# Altium PCB PCB1.PcbDoc
Units mm, origin at the board's own origin, x right, y up, seen from the top; angles counter-clockwise.
Board outline 60 x 60 mm, 2 copper layers (Top Layer, Bottom Layer); 13 components, 9 nets, 38 pads, 9 vias.
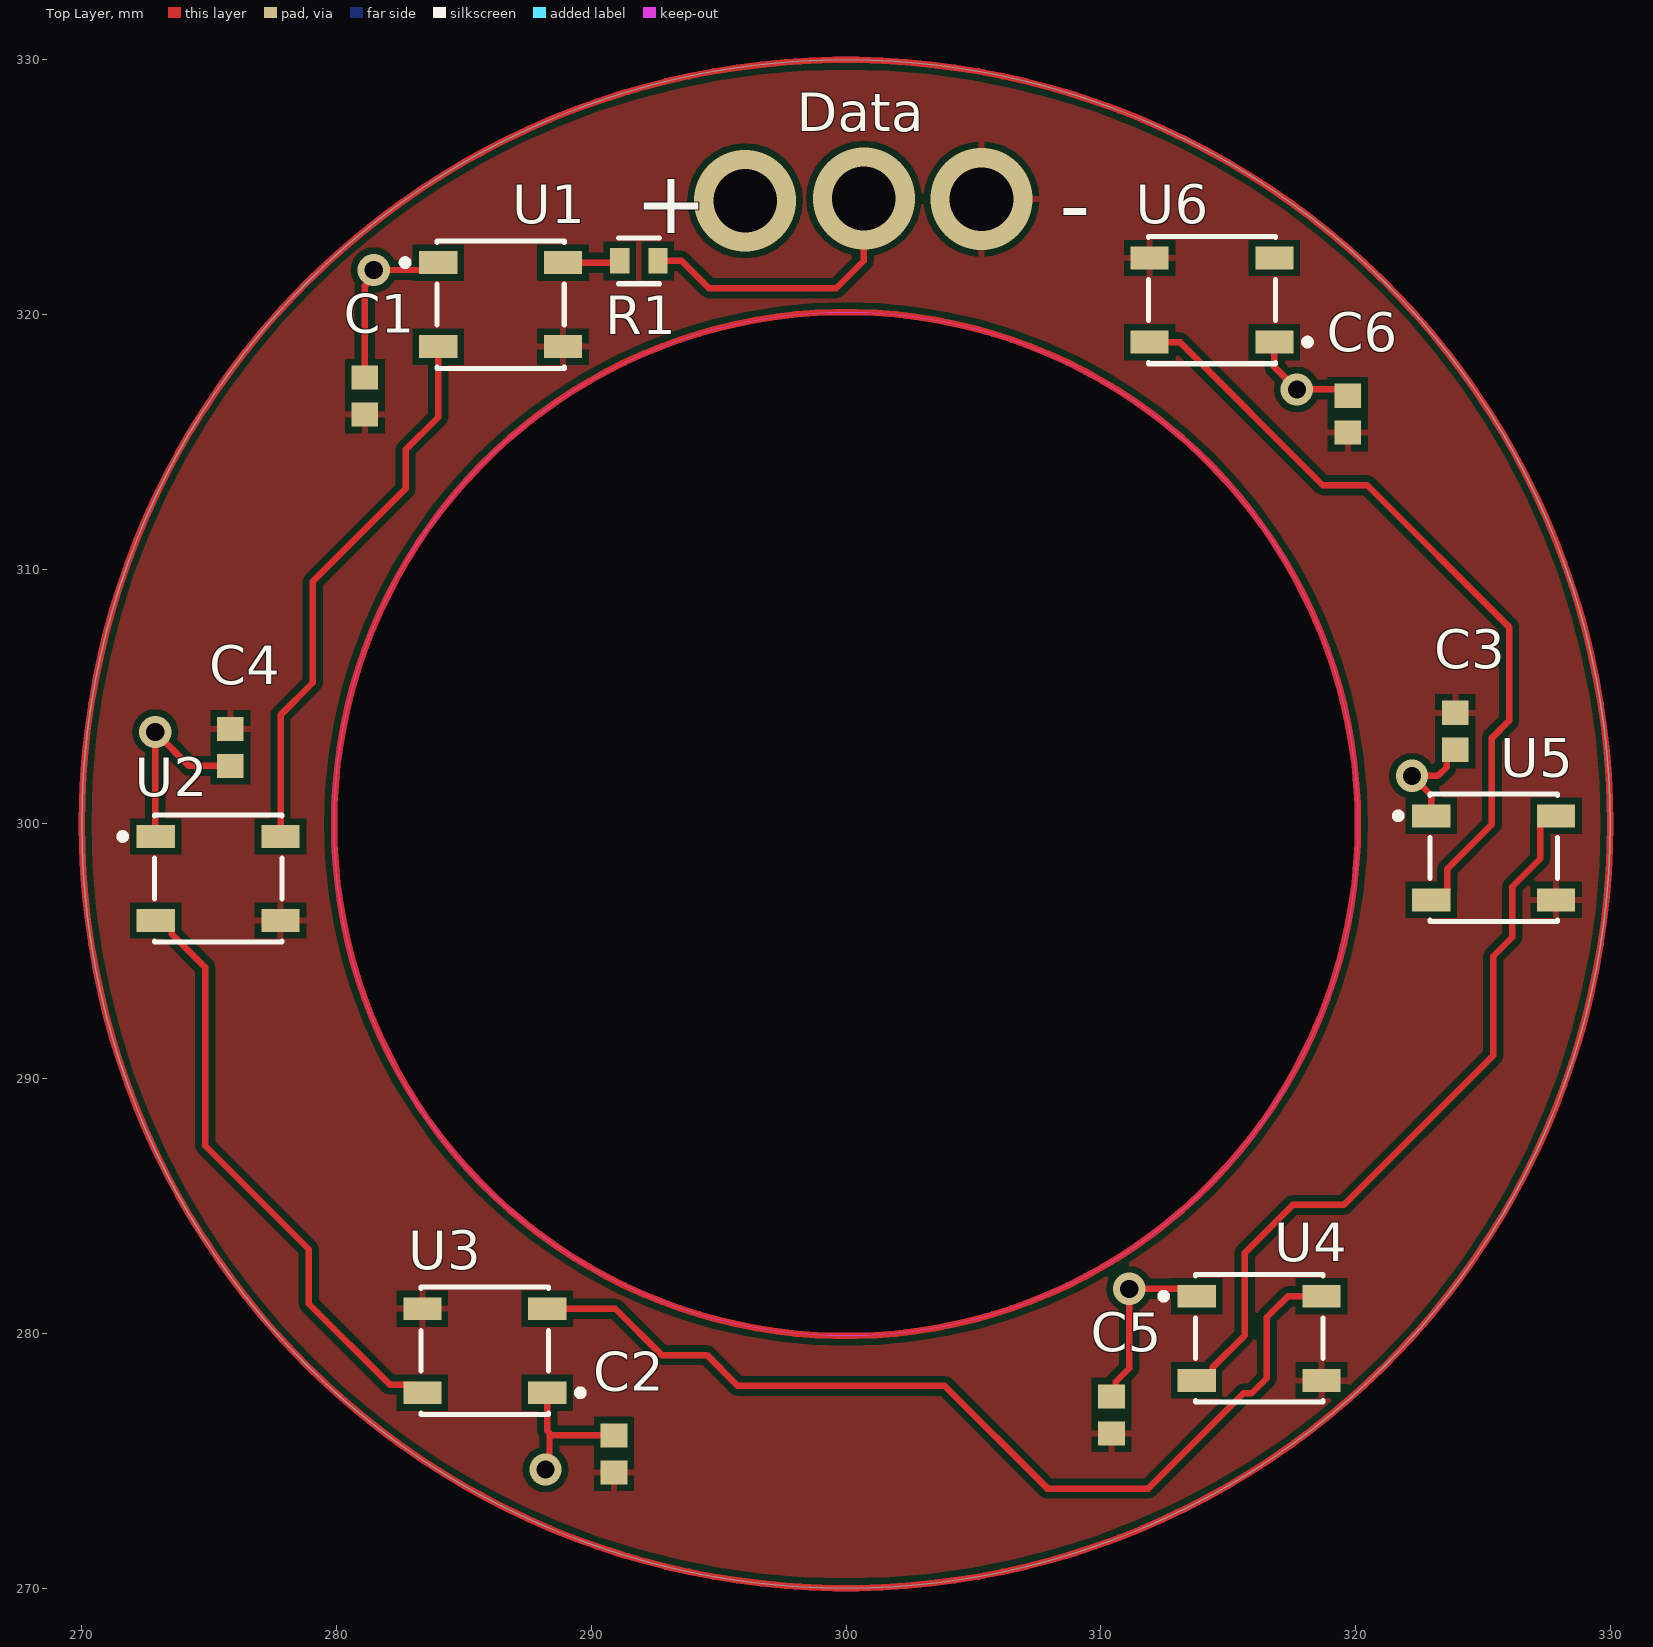
[diagram p0: Top Layer view]
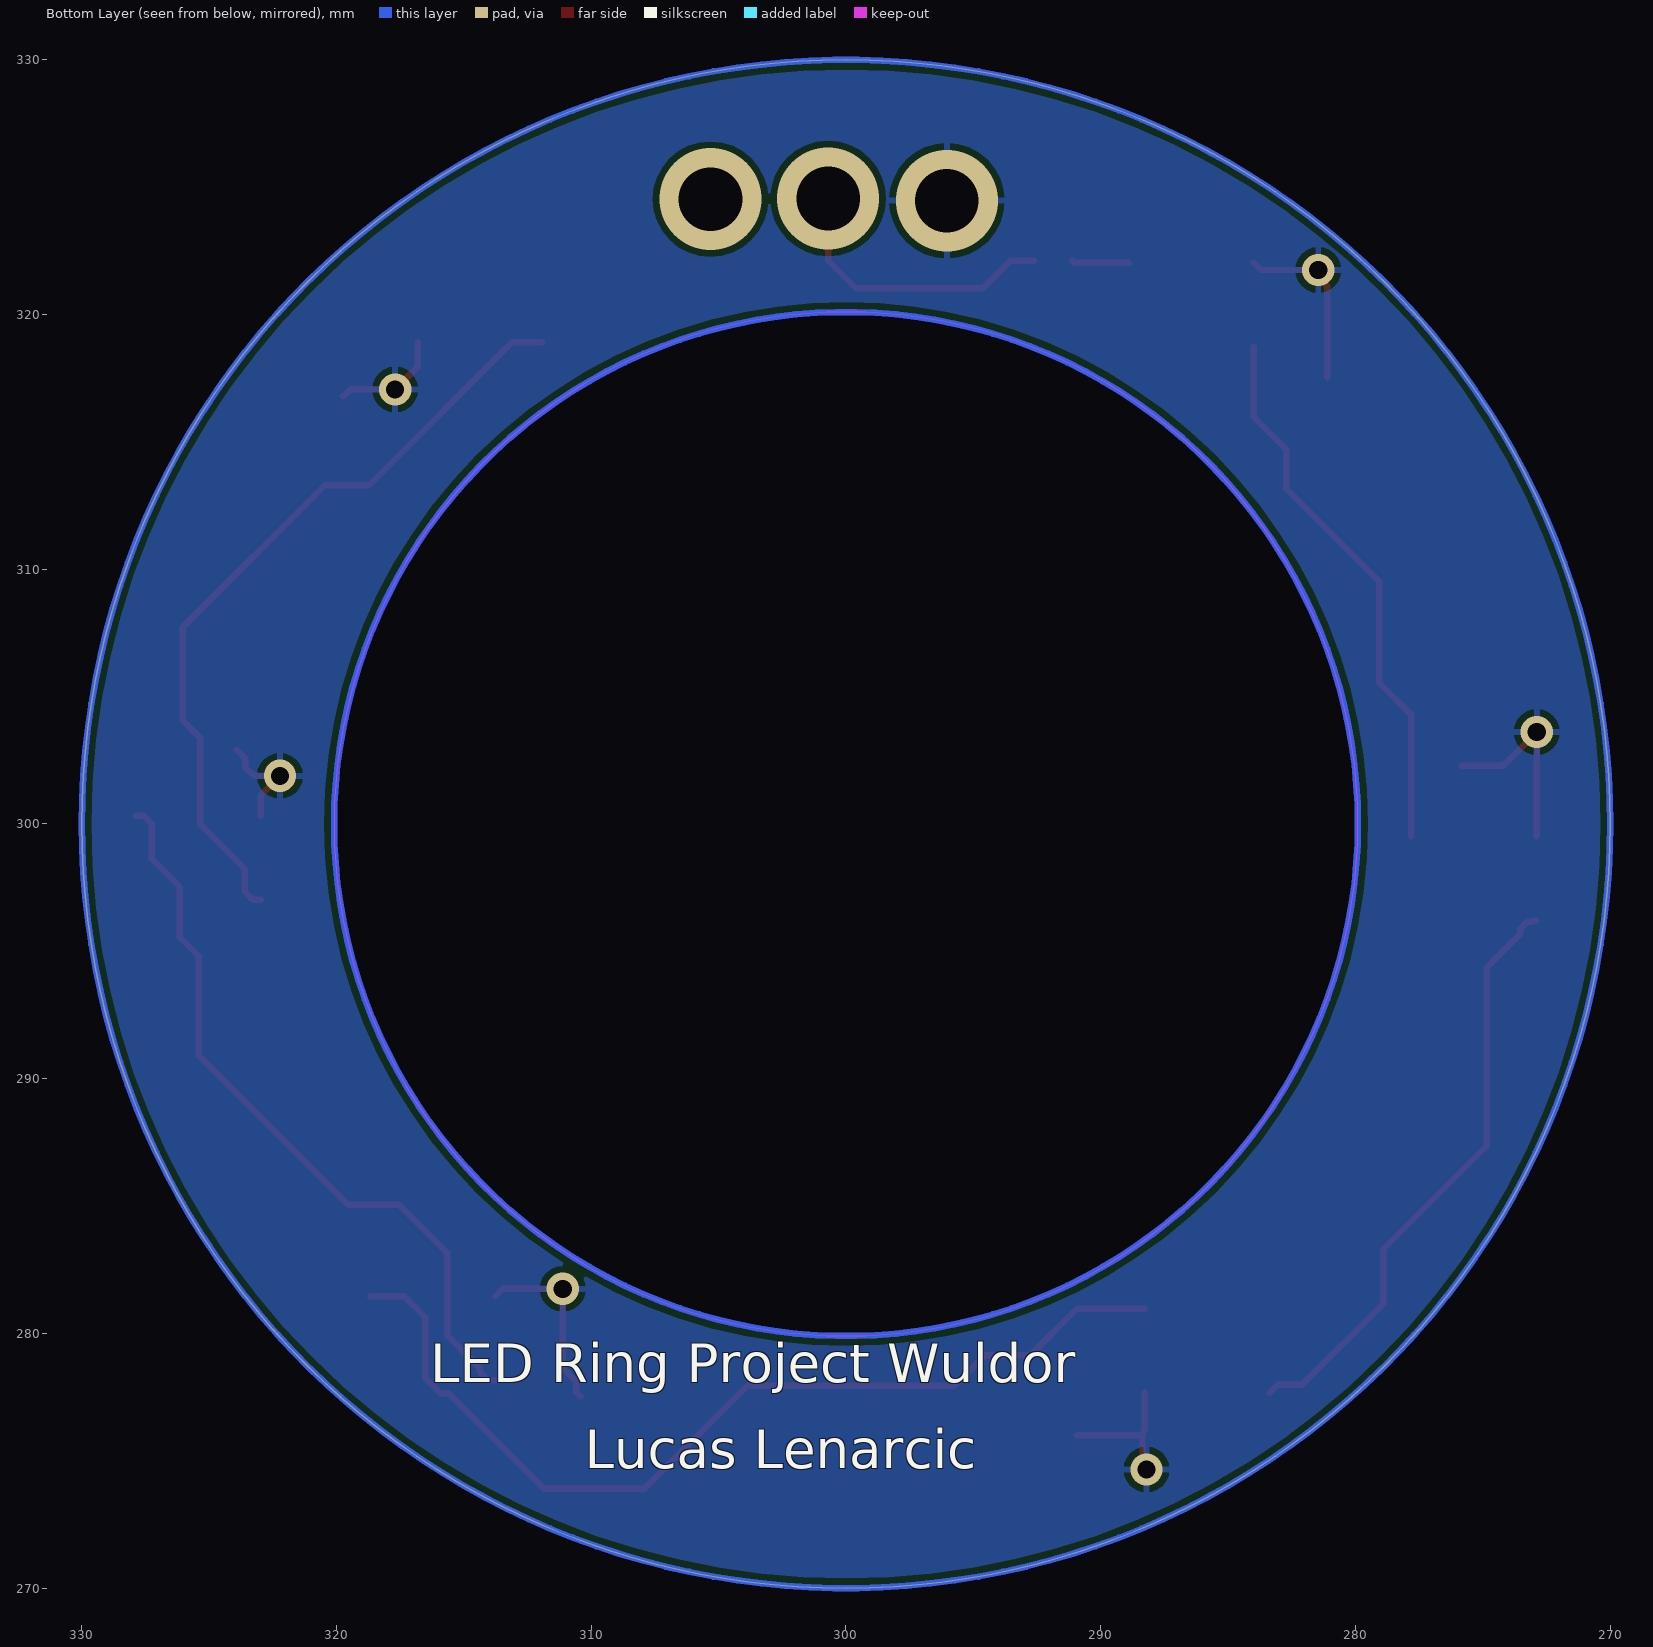
[diagram p1: Bottom Layer view, seen from below]
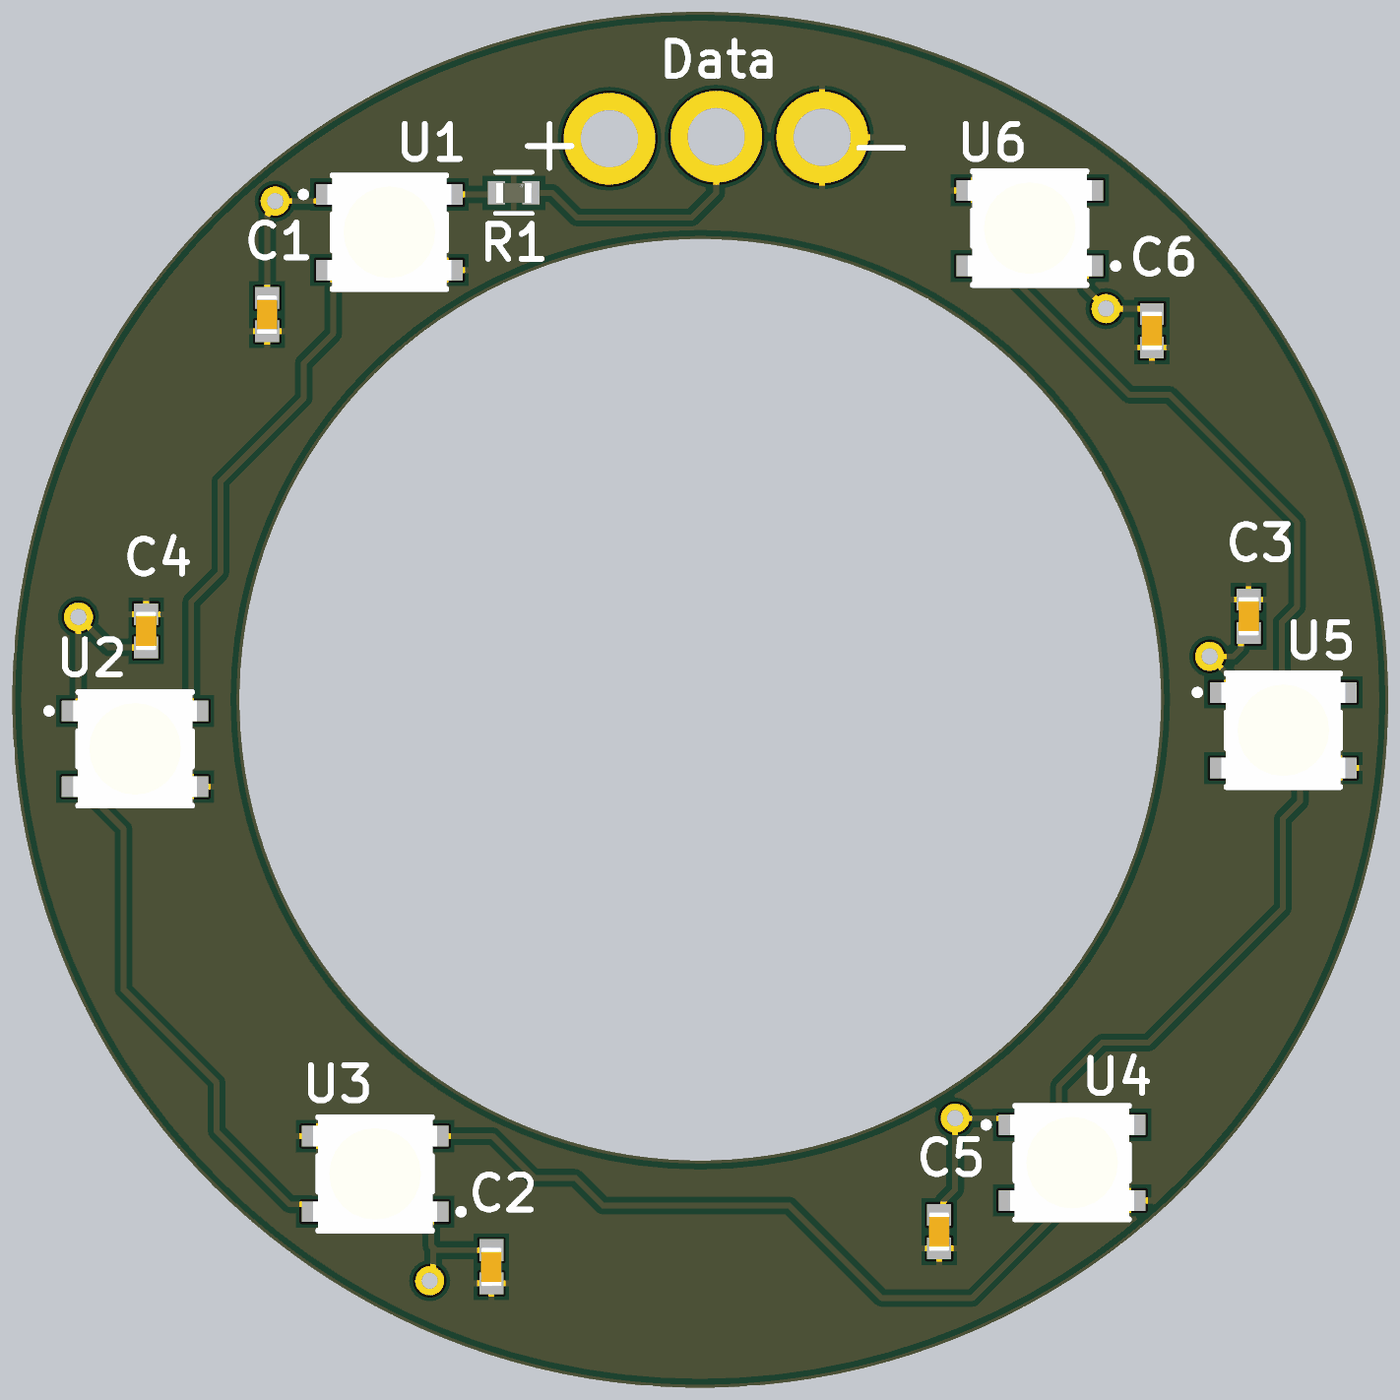
[diagram p2: 3D render of the assembled board from above, using the file's embedded part models]

## Layer stack, top to bottom
Top Solder: solder mask 0.0102, Solder Resist, Dk 3.5
Top Layer: signal copper 0.0356
Dielectric 1: dielectric 0.32, FR-4, Dk 4.8
Bottom Layer: signal copper 0.0356
Bottom Solder: solder mask 0.0102, Solder Resist, Dk 3.5

## Board outline
300,270 cw(c300,300) 270,300 cw(c300,300) 300,330 cw(c300,300) 330,300 cw(c300,300)
cut-out: 300,279.9 cw(c300,300) 279.9,300 cw(c300,300) 300,320.1 cw(c300,300) 320.1,300 cw(c300,300)

## Design rules (kind name [scope] priority, off if disabled: settings)
Clearance [All] p1: gap=0.254 ignorepadtopadclearanceinfootprint=FALSE except(0: Arc-Hole Track-Hole SMDPad-Hole THPad-Hole Via-Hole Fill-Hole Poly-Hole Region-Hole Text-Hole)
PolygonConnect [All] p1: connectstyle=Relief reliefconductorwidth=0.254 reliefentries=4 polygonreliefangle="90 Angle" airgapwidth=0.254
RoutingVias [All] p1: holewidth=0.711 width=1.27 viastyle="Through Hole" minholewidth=0.711 minwidth=1.27 maxholewidth=0.711 maxwidth=1.27
SolderMaskExpansion [All] p1: expansion=0.102 istentingtop=FALSE
Width [All] p1: maxlimit=0.254 minlimit=0.254 preferedwidth=0.254
30 further rules are at their usual default settings.

## Components (designator, comment, footprint, x,y, rotation, side; value= is the part's Value field where it differs from the comment)
C1 "GRM188R71H104KA93D" CAPC1608X90X35ML10T15 281.11,316.8 r270 top
C2 "GRM188R71H104KA93D" CAPC1608X90X35ML10T15 290.89,275.27 r270 top
C3 "GRM188R71H104KA93D" CAPC1608X90X35ML10T15 323.92,303.64 r90 top
C4 "GRM188R71H104KA93D" CAPC1608X90X35ML10T15 275.83,303.005 r90 top
C5 "GRM188R71H104KA93D" CAPC1608X90X35ML10T15 310.422,276.799 r270 top
C6 "GRM188R71H104KA93D" CAPC1608X90X35ML10T15 319.7,316.09 r270 top
R1 "CRCW0603330RFKEA" FP-CRCW0603-e3-MFG 291.868,322.109 r0 top (schematic designator R?)
U1 "1655" ADA-RGB-1655_V 286.44,320.39 r0 top
U2 "1655" ADA-RGB-1655_V 275.35,297.86 r0 top
U3 "1655" ADA-RGB-1655_V 285.82,279.32 r180 top
U4 "1655" ADA-RGB-1655_V 316.22,279.81 r0 top
U5 "1655" ADA-RGB-1655_V 325.43,298.67 r0 top
U6 "1655" ADA-RGB-1655_V 314.37,320.57 r180 top

## Footprints (in the part's own frame and the unit in brackets; to place one, negate y for a bottom-side part, rotate by r counter-clockwise, add the part's x,y. Pads: shape width x height; smd on the part's side, far side on the other; paste and mask are expansions set on the pad)
ADA-RGB-1655_V [mm] "SMD, 4-Leads, Body 5x5mm"
  rect 1.5x0.9 smd: 1(-2.45,1.65) 2(-2.45,-1.65) 3(2.45,-1.65) 4(2.45,1.65)
  silkscreen extent -3.87,-2.5 2.5,2.5, body extent -2.7,-2.5 2.7,2.5, height 1.68
CAPC1608X90X35ML10T15 [mm] "Chip Capacitor, 2-Leads, Body 1.7x0.9mm, IPC Low Density"
  rect 0.95x1.05 smd: 1(-0.725,0) 2(0.725,0)
  body extent -0.85,-0.45 0.85,0.45, height 0.9
FP-CRCW0603-e3-MFG [mm]
  rect 0.75x1 smd paste+0 mask+0: 1(-0.75,0) 2(0.75,0)
  silkscreen extent -0.8,-0.9 0.8,0.9, body extent -1.22,-0.6 1.22,0.6, height 0.25

## Part data
C1 C2 C3 C4 C5 C6: library part CMP-2100-03643-1, "Chip Capacitor, 0.1 uF, +/- 10%, 50 V, -55 to 125 degC, 0603 (1608 Metric), RoHS, Tape and Reel", Capacitance=100nF, Case Code (Imperial)=0603, Case Code (Metric)=1608, Dielectric=X7R, Dielectric Material=Ceramic, Insulation Resistance=10GR, Manufacturer=Murata, Max Operating Temperature=125degC, Min Operating Temperature=-55degC, Package Description="2-Pin Surface Mount Device, Body 1.6 x 0.8 mm", Package Quantity=1, Tolerance=10%, Voltage=50V, Case/Package=0603, Contact Plating=Tin, Datasheet URL=http://psearch.en.murata.com/capacitor/product/GRM188R71H104KA93%23.pdf, Datasheet Version=42675.0, Depth=0.8mm, Height=0.8mm, Lead Free=LeadFree, Length=1.6mm, Manufacturer URL=http://www.murata.com/, Material=Ceramic, Mount=SurfaceMount, Number of Pins=2, Package Reference=0603, Packaging=TapeandReel, Radiation Hardening=No, REACH SVHC=NoSVHC, RoHSCompliant=true, Termination=SMD/SMT, Thickness=0.035inch, Voltage Rating=50V, Voltage Rating (DC)=50V, Width=0.8mm
R1: library part CMP-1012-00454-3, "RES Thick Film, 330Ω, 1%, 0.1W, 100ppm/°C, 0603", Case Code (Imperial)=0603, Case Code (Metric)=1608, Max Operating Temperature=155°C, Max Power Dissipation=100mW, Min Operating Temperature=-55°C, Package Quantity=10, Resistance=330R, Temperature Coefficient=100ppm/°C, Tolerance=1%, Voltage Rating=75V, Case/Package=0603, Composition="Thick Film", Contact Plating=Tin, Depth=0.85mm, Features="Automotive AEC-Q200", Height=0.45mm, Lead Free="Lead Free", Length=1.55mm, Military Standard=Not, Mount="Surface Mount", Number of Terminations=2, Packaging="Tape and Reel", Power Rating=100mW, Radiation Hardening=No, Termination=SMD/SMT, Voltage Rating (DC)=75V, Weight=7.1E-05oz, Width=0.033inch
U1 U2 U3 U4 U5 U6: library part CMP-2000-05026-1, "Intelligent Control LED Integrated Light Source, 3.5 to 5.3 V, -25 to 80 degC, 4-Pin SMD, RoHS, Tape and Reel", Color=Red,Green,Blue(RGB), Manufacturer=Adafruit-Industries-LLC, Package Description="4-Pin Surface Mount Device, Body 5 x 5 mm", Category=Optoelectronics, Configuration=Discrete, Controller Type=-, Datasheet URL=http://datasheet.octopart.com/ADA1655-Adafruit-Industries-datasheet-32028139.pdf, Datasheet Version=May-13, Family=Addressable,Specialty, Interface=-, Manufacturer URL=https://www.adafruit.com/, Mounting Type=SurfaceMount, Number of LEDs=10, Package Reference=1655, Series=Neopixel, Size / Dimension=5.00mmLx5.00mmW, Utilized LED=WS2812(5050)

## Via types
v1: diameter 1.27, hole 0.711, Top Layer to Bottom Layer, 6 vias
v2: diameter 4, hole 2.5, Top Layer to Bottom Layer, 3 vias

## Nets (pads, with @x,y where several pads share a name; then routed paths per layer and width w, separated by ;. In a path a pad name is that pad's centre, name@x,y a point inside that pad or via, vN(x,y) a via of type N, cw(c..) or ccw(c..) an arc to the next point about the centre after c; other vN are vias at no path point)
DAT: R1.2 | length 11.4
  Top Layer w0.254: R1.2 293.541,322.109 294.62,321.03 299.62,321.03 300.7,322.11 v2(300.7,324.56)
GND: C1.2 C2.2 C3.2 C4.2 C5.2 C6.2 U1.3 U2.3 U3.3 U4.3 U5.3 U6.3
  other v2: 305.32,324.53
NetR?_1: R1.1 U1.4 | length 2.3
  Top Layer w0.254: U1.4 291.049,322.04 R1.1
NetU1_2: U1.2 U2.4 | length 21.8
  Top Layer w0.254: U2.4 277.8,304.28 279.07,305.55 279.07,309.52 282.71,313.16 282.71,314.69 283.99,315.97 U1.2
NetU2_2: U2.2 U3.4 | length 23.6
  Top Layer w0.254: U2.2 273,296.21 273.04,296.17 273.24,296.17 273.523,295.887 273.523,295.687 274.84,294.37 274.84,287.37 278.91,283.3 278.91,281.17 282.087,277.993 283.047,277.993 U3.4
NetU3_2: U3.2 U4.4 | length 37.9
  Top Layer w0.254: U3.2 290.94,280.97 292.76,279.15 294.54,279.15 295.75,277.94 303.88,277.94 307.91,273.91 311.87,273.91 315.61,277.65 315.93,277.65 316.52,278.24 316.52,280.63 317.35,281.46 U4.4
NetU4_2: U4.2 U5.4 | length 29.5
  Top Layer w0.254: U4.2 314.047,278.16 314.37,278.483 314.37,278.64 315.65,279.92 315.65,283.16 317.534,285.044 319.544,285.044 325.41,290.91 325.41,294.804 326.16,295.554 326.16,297.54 327.257,298.637 327.257,299.997 327.58,300.32 U5.4
NetU5_2: U5.2 U6.4 | length 30.9
  Top Layer w0.254: U6.4 313.1,318.92 318.72,313.3 320.463,313.3 326.03,307.733 326.03,304.05 325.36,303.38 325.36,299.99 323.603,298.233 323.603,297.343 323.28,297.02 U5.2
V++: C1.1 C2.1 C3.1 C4.1 C5.1 C6.1 U1.1 U2.1 U3.1 U4.1 U5.1 U6.1 | length 36.2
  Top Layer w0.254: U2.1 272.88,299.53 v1(272.88,303.61) 274.21,302.28 C4.1 ; C1.1 281.11,321.125 281.46,321.475 v1(281.46,321.75) 283.7,321.75 U1.1 ; v1(288.2,274.66) 288.36,274.82 288.36,276.085 ; U3.1 288.27,276.175 288.36,276.085 ; C2.1@290.94,275.995 C2.1 288.45,275.995 288.36,276.085 ; C5.1 310.59,277.693 310.59,278.1 311.12,278.63 v1(311.12,281.75) 313.48,281.75 U4.1 ; U6.1 316.82,317.94 v1(317.7,317.06) 319.455,317.06 C6.1 C6.1@319.75,316.815 ; U5.1 322.98,301.13 v1(322.22,301.89) 323.24,301.89 323.58,302.23 323.58,302.575 C3.1
  other v2: 296.04,324.47
pads on no net: U6.2

## Polygon pours and split planes (outlines as drawn)
no net on Multi-Layer (none): 300,279.9 cw(c300,300) 279.9,300 cw(c300,300) 300,320.1 cw(c300,300) 320.1,300 cw(c300,300)
V++ on Bottom Layer "Bottom Layer-V++" (solid, pour order 4): 300,270 cw(c300,300) 270,300 cw(c300,300) 300,330 cw(c300,300) 330,300 cw(c300,300)
no net on Bottom Layer "Bottom Layer-No Net" (none, pour order 3): 300,279.9 cw(c300,300) 279.9,300 cw(c300,300) 300,320.1 cw(c300,300) 320.1,300 cw(c300,300)
GND on Top Layer "Top Layer-GND" (solid, pour order 2): 299.973,270.013 cw(c299.973,300.013) 269.973,300.013 cw(c299.973,300.013) 299.973,330.013 cw(c299.973,300.013) 329.973,300.013 cw(c299.973,300.013)

## Other copper
Multi-Layer:
  circle w0.254: c300,300 r30
  circle w0.254: c300,300 r20.1

## Silkscreen, mask and mechanical layers (free items; w line width, h text height)
Top Overlay:
  text "Data" at 298.064,327.204 h1.52
  text "+" at 291.714,323.187 h2.5
  text "-" at 309.606,323.104 h2.5
Bottom Overlay:
  text "LED Ring Project Wuldor" at 316.316,278.082 h1.52
  text "Lucas Lenarcic" at 310.256,274.704 h1.52
Mechanical 1:
  the board outline again, w1.2